# Altium PCB PCB_PCB_Simple Signal Generator_2021-09-18_2021-10-02.pcbdoc
Units mil, origin at the board's own origin, x right, y up, seen from the top; angles counter-clockwise.
Board outline 4947.01 x 5831.86 mil, 2 copper layers (Top Layer, Bottom Layer); 25 components, 14 nets, 79 pads, 0 vias.
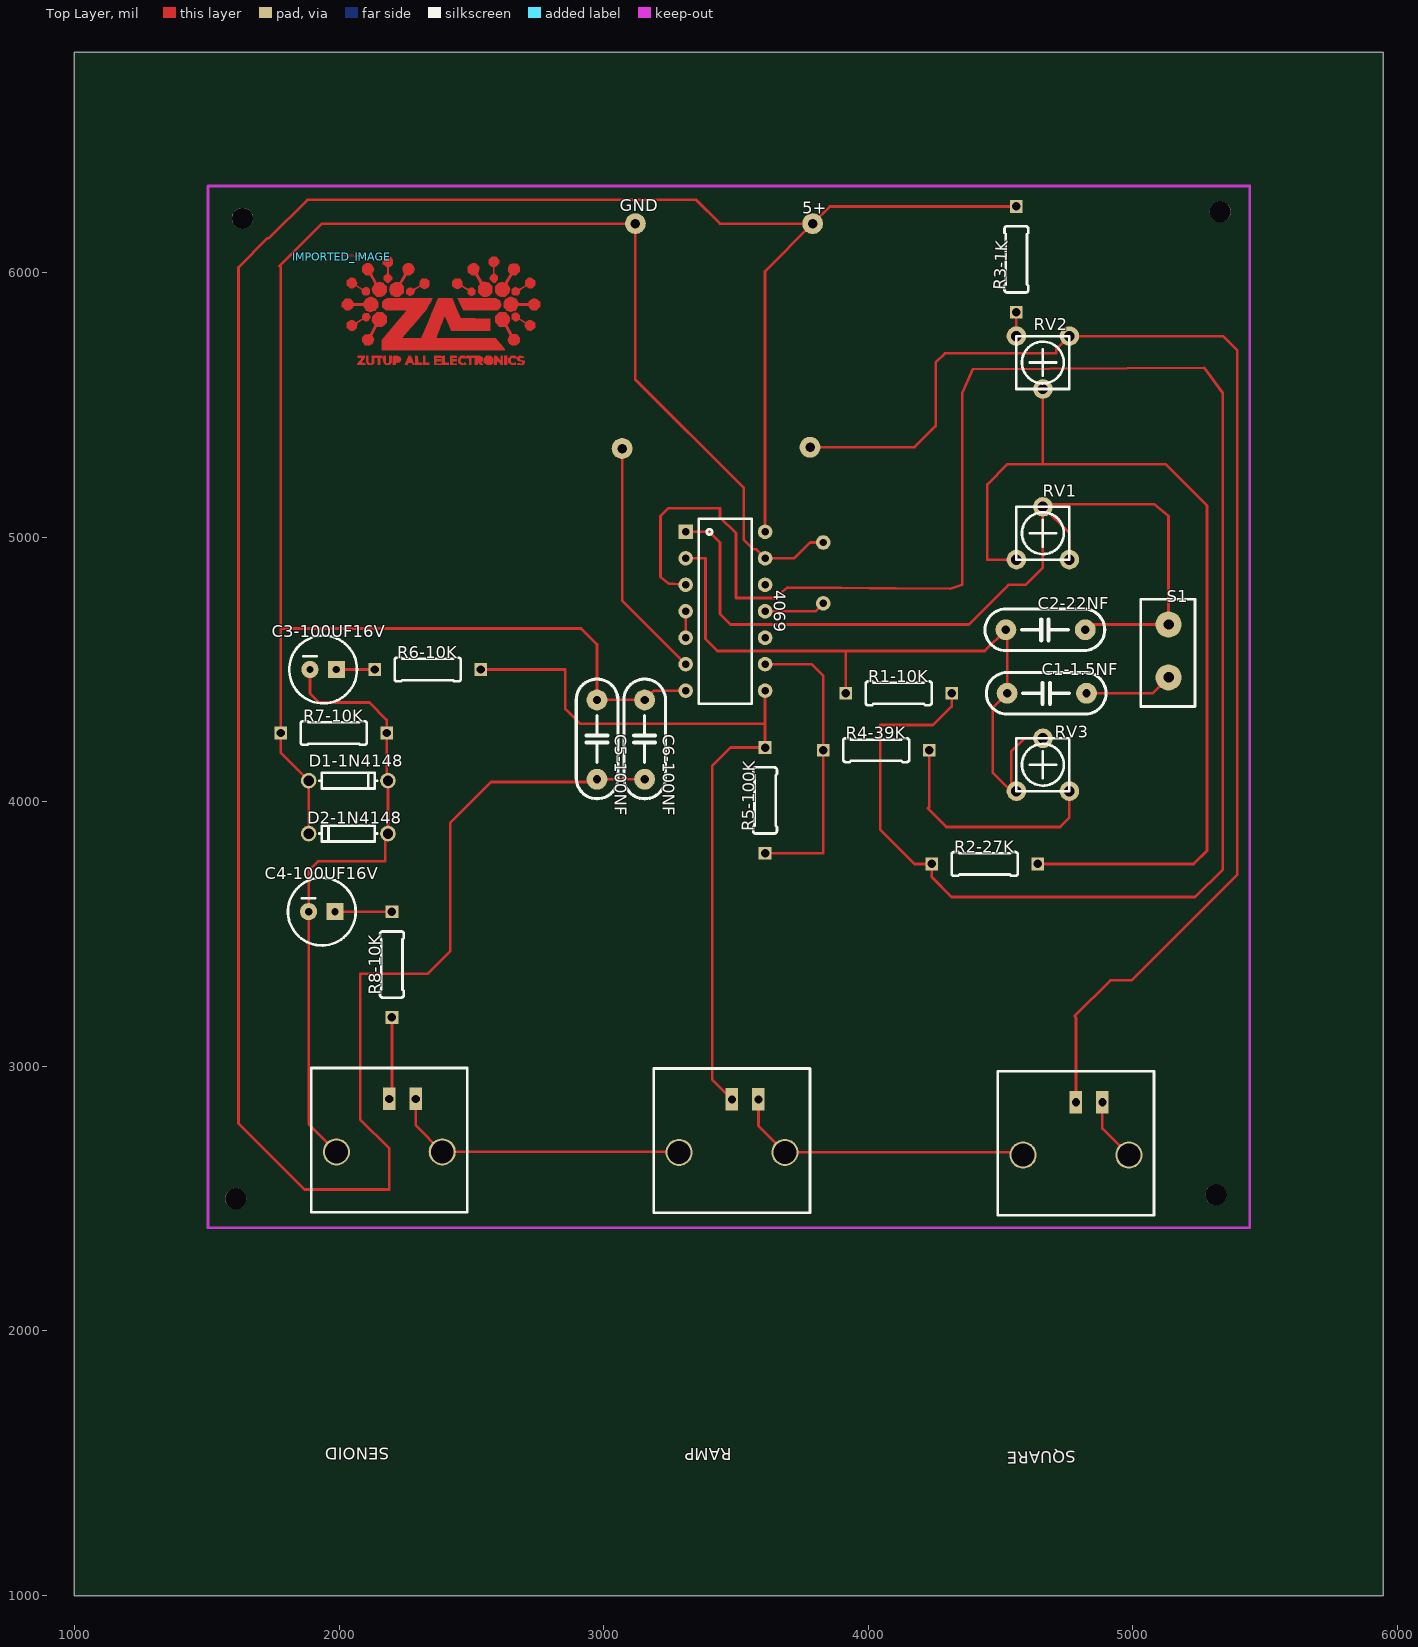
[diagram p0: Top Layer view]
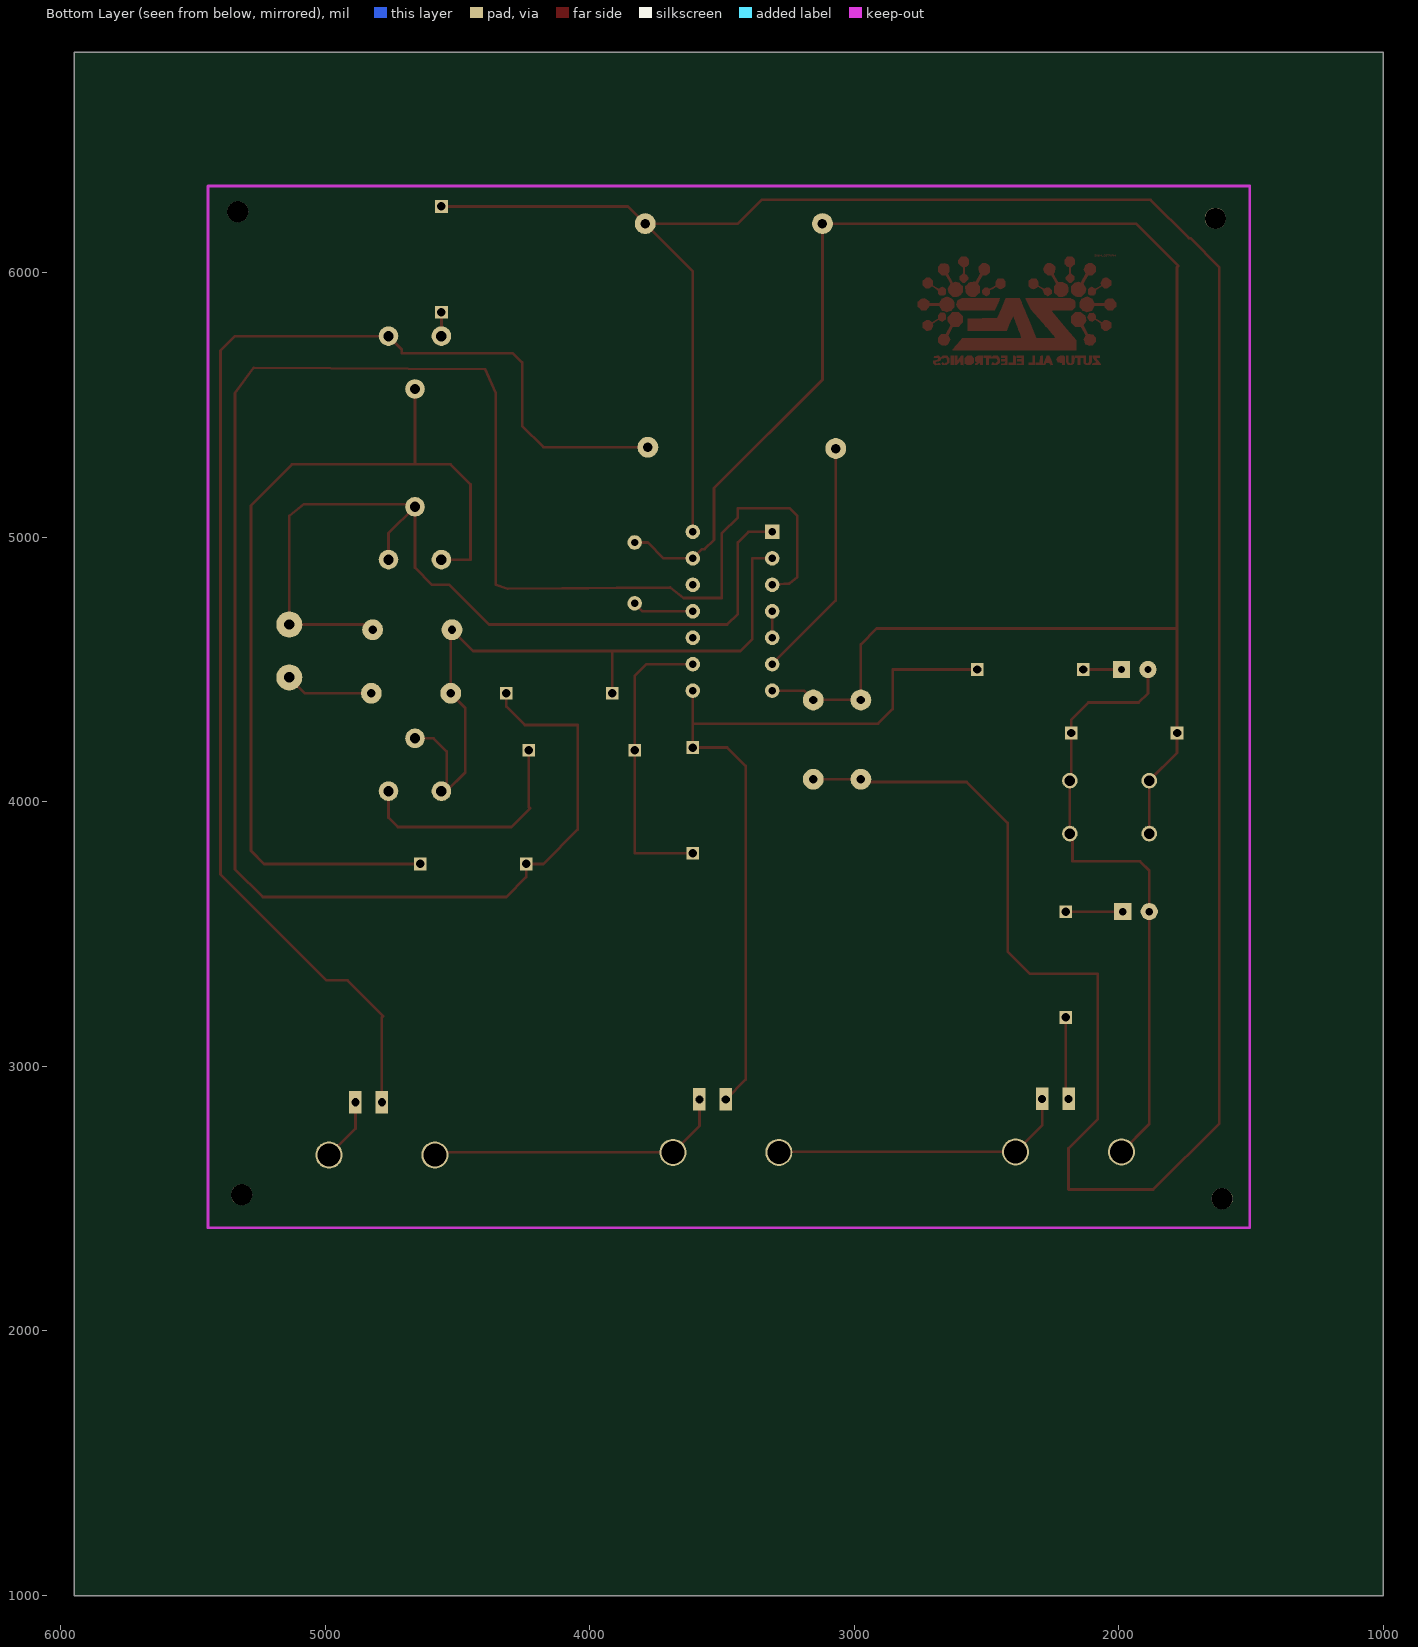
[diagram p1: Bottom Layer view, seen from below]

## Layer stack, top to bottom
Top Layer: signal copper (thickness not stored)
Dielectric: dielectric 12.6, FR-4, Dk 4.8
Bottom Layer: signal copper (thickness not stored)

## Board outline
5947.01,1000 1000,1000 1000,6831.86 5947.01,6831.86

## Components (designator, comment, footprint, x,y, rotation, side; value= is the part's Value field where it differs from the comment)
4069 "DIP14" DIP14 3460,4719.85 r270 top
C1-1.5NF "7X5MM-CAP" 7X5MM-CAP 4525,4409.85 r0 top
C2-22NF "7X5MM-CAP" 7X5MM-CAP 4520,4649.85 r0 top
C3-100UF16V "CPOL-RADIAL-100UF-25V" CPOL-RADIAL-100UF-25V 1940,4499.85 r0 top
C4-100UF16V "CPOL-RADIAL-100UF-25V" CPOL-RADIAL-100UF-25V 1935,3584.85 r0 top
C5-100NF "7X5MM-CAP" 7X5MM-CAP 2975,4384.85 r270 top
C6-100NF "7X5MM-CAP" 7X5MM-CAP 3155,4384.85 r270 top
D1-1N4148 "DO-1N4148" DO-1N4148 2035,4079.85 r0 top
D2-1N4148 "DO-1N4148" DO-1N4148 2035,3879.85 r180 top
IMPORTED_IMAGE "IMPORTED_IMAGE" IMPORTED_IMAGE 2010.51,6059.6 r0 top
R1-10K "RTH025W" RTH025W 4115,4409.85 r0 top
R2-27K "RTH025W" RTH025W 4440,3764.85 r0 top
R3-1K "RTH025W" RTH025W 4560,6049.85 r90 top
R4-39K "RTH025W" RTH025W 4030,4194.85 r0 top
R5-100K "RTH025W" RTH025W 3610,4004.85 r90 top
R6-10K "RTH025W" RTH025W 2335,4499.85 r0 top
R7-10K "RTH025W" RTH025W 1980,4259.85 r0 top
R8-10K "RTH025W" RTH025W 2200,3384.85 r90 top
RAMP "BNC" BNC 3485,2774.85 r180 top
RV1 "TRIM_POT_PTH" TRIM_POT_PTH 4660,5014.85 r0 top
RV2 "TRIM_POT_PTH" TRIM_POT_PTH 4660,5659.85 r180 top
RV3 "TRIM_POT_PTH" TRIM_POT_PTH 4660,4139.85 r0 top
S1 "CHAVE PUSH" "CHAVE PUSH" 5135,4569.85 r0 top
SENOID "BNC" BNC 2190,2776.85 r180 top
SQUARE "BNC" BNC 4785,2764.85 r180 top

## Footprints (in the part's own frame and the unit in brackets; to place one, negate y for a bottom-side part, rotate by r counter-clockwise, add the part's x,y. Pads: shape width x height; smd on the part's side, far side on the other; paste and mask are expansions set on the pad)
7X5MM-CAP [mm]
  round 2 hole 0.8: 1(0,0) 2(7.62,0)
  silkscreen extent -2,-2 9.49,2.01
BNC [mil]
  round 102.4 hole 86.6: 3(-200,100) 4(200,100)
  rect 47.2x85 hole 31.4: GND(-100,-100) S(0,-100)
  silkscreen extent -295,-217 295,328
"CHAVE PUSH" [mm]
  round 2.5 hole 1: 1(0,2.54) 2(0,-2.54)
  silkscreen extent -2.67,-5.33 2.54,4.95
CPOL-RADIAL-100UF-25V [mil]
  rect 65x65 hole 27.6: 1(50,0)
  round 65 hole 27.6: 2(-50,0)
  silkscreen extent -128,-128 128,128
DIP14 [mil]
  rect 55x55 hole 28: 1(-300,-150)
  round 55 hole 28: 2(-200,-150) 3(-100,-150) 4(0,-150) 5(100,-150) 6(200,-150) 7(300,-150) 8(300,150) 9(200,150) 10(100,150) 11(0,150) 12(-100,150) 13(-200,150) 14(-300,150)
  silkscreen extent -350,-100 350,100
DO-1N4148 [mm]
  round 1.5 hole 1: A(-3.81,0) C(3.81,0)
  silkscreen extent -2.79,-0.76 2.79,0.76
IMPORTED_IMAGE [mil]
  Top Layer region: 249.31,-405.23 246.94,-409.49 242.83,-408.55 238.72,-407.61 245.54,-391.02 252.36,-374.42 261.3,-374.42 267.18,-388.36 268.99,-392.65 270.7,-396.71 272.22,-400.32 273.44,-403.23 274.26,-405.21 275.81,-408.94 267.14,-408.94 264.09,-400.98 251.68,-400.98 hole: 22643809.49,56673086.88 22643809.49,56633256.88 22643809.49,56633256.88 22696739.49,56633256.88 22696739.49,56633256.88 22696739.49,56712916.88 22696739.49,56712916.88 22643809.49,56712916.88 22643809.49,56712916.88 22643809.49,56673086.88
  Top Layer region: 581.58,-408.45 576.95,-409.33 576.95,-374.42 584.38,-374.42 592.48,-384.38 600.59,-394.34 600.77,-374.42 608.71,-374.42 608.71,-408.94 601.24,-408.94 594.56,-400.98 587.89,-393.02 586.21,-407.57
  Top Layer region: 686.97,-406.13 683.18,-409.28 662.96,-407.61 665.61,-402.3 672.74,-402.96 679.87,-403.61 681.36,-401.18 682.86,-398.75 673.57,-395.67 669.97,-394.41 667.01,-393.24 665.02,-392.29 664.28,-391.69 664.25,-391.43 664.17,-391.04 664.03,-390.53 663.85,-389.92 663.63,-389.24 663.38,-388.5 663.11,-387.72 662.81,-386.93 661.33,-383.07 665.79,-378.6 670.24,-374.13 678.31,-374.94 686.37,-375.75 687.46,-379.07 688.54,-382.39 672.22,-382.39 672.22,-387.29 681.49,-390.35 690.75,-393.42 690.75,-402.98
  Top Layer region: 449.01,-408.94 444.17,-404.55 439.33,-400.15 439.33,-386.22 447.57,-374.42 464.74,-374.42 467.91,-377.61 471.09,-380.79 471.09,-374.42 500.2,-374.42 500.2,-382.39 489.61,-382.39 489.61,-408.94 481.67,-408.94 481.67,-382.92 450.1,-382.92 447.15,-392.26 448.74,-396.41 449.14,-397.28 449.68,-398.15 450.32,-399 451.06,-399.81 451.86,-400.55 452.71,-401.2 453.57,-401.74 454.42,-402.14 458.52,-403.72 461.81,-400.99 465.09,-398.26 471.22,-405.67 466.97,-407.31 466.5,-407.47 465.97,-407.63 465.4,-407.79 464.78,-407.94 464.11,-408.08 463.42,-408.22 462.7,-408.34 461.95,-408.46 461.19,-408.57 460.41,-408.66 459.64,-408.74 458.86,-408.81 458.09,-408.87 457.32,-408.91 456.58,-408.93 455.86,-408.94
  Top Layer region: 58.22,-408.94 58.22,-406.85 58.23,-406.73 58.26,-406.59 58.31,-406.43 58.38,-406.24 58.58,-405.81 58.84,-405.31 59.17,-404.74 59.57,-404.11 60.02,-403.42 60.52,-402.67 61.08,-401.88 61.68,-401.05 62.33,-400.19 63.01,-399.3 63.73,-398.39 64.48,-397.45 64.87,-396.98 65.26,-396.51 65.65,-396.04 66.06,-395.56 67.63,-393.68 69.11,-391.84 70.45,-390.09 71.62,-388.49 72.59,-387.07 73.34,-385.88 73.81,-384.97 73.99,-384.38 74.1,-382.39 60.87,-382.39 60.87,-374.42 87.34,-374.42 87.34,-378.2 87.33,-378.4 87.3,-378.63 87.26,-378.87 87.2,-379.12 87.13,-379.39 87.04,-379.68 86.93,-379.98 86.81,-380.29 86.68,-380.62 86.53,-380.95 86.37,-381.3 86.2,-381.66 86.02,-382.03 85.82,-382.41 85.61,-382.79 85.39,-383.19 85.16,-383.59 84.92,-383.99 84.67,-384.4 84.41,-384.82 84.14,-385.24 83.87,-385.66 83.58,-386.08 83.29,-386.51 82.99,-386.93 82.68,-387.36 82.37,-387.78 82.05,-388.21 81.72,-388.63 81.39,-389.05 81.06,-389.46 80.72,-389.87 79.97,-390.77 79.27,-391.61 78.61,-392.41 78.01,-393.16 77.45,-393.86 76.95,-394.51 76.49,-395.12 76.08,-395.69 75.72,-396.23 75.41,-396.72 75.15,-397.17 74.94,-397.6 74.78,-397.99 74.66,-398.34 74.6,-398.67 74.59,-398.98 74.62,-399.25 74.71,-399.5 74.85,-399.73 75.03,-399.94 75.27,-400.13 75.55,-400.3 75.89,-400.46 76.28,-400.6 76.71,-400.73 77.2,-400.85 77.73,-400.97 78.32,-401.07 78.96,-401.17 79.65,-401.27 80.39,-401.37 81.18,-401.46 88.25,-402.3 89.34,-405.62 90.42,-408.94
  Top Layer region: 304.35,-404.96 304.35,-408.94 277.89,-408.94 277.89,-374.03 282.52,-374.91 287.15,-375.8 288.76,-400.98 304.35,-400.98
  Top Layer region: 145.56,-395.66 145.56,-408.94 134.97,-408.94 134.97,-382.39 124.39,-382.39 124.39,-374.42 153.5,-374.42 153.5,-382.39 145.56,-382.39
  Top Layer region: 546.93,-408.94 542.09,-404.55 537.25,-400.15 537.25,-384.13 541.63,-379.28 546.01,-374.42 561.98,-374.42 571.66,-383.21 571.66,-403.44 566.54,-406.19 565.98,-406.47 565.36,-406.75 564.69,-407.01 563.98,-407.26 563.22,-407.5 562.44,-407.73 561.63,-407.94 560.79,-408.13 559.95,-408.31 559.09,-408.47 558.24,-408.61 557.39,-408.73 556.55,-408.82 555.73,-408.89 554.94,-408.93 554.17,-408.94 hole: 25664259.49,56549906.88 25742949.49,56615436.88 25742949.49,56615436.88 25727049.49,56752756.88 25727049.49,56752756.88 25588249.49,56768896.88 25588249.49,56768896.88 25571629.49,56725456.88 25571629.49,56725456.88 25568294.47,56715981.98 25568294.47,56715981.98 25565182.46,56705693.91 25565182.46,56705693.91 25562361.77,56694921.4 25562361.77,56694921.4 25559900.74,56683993.13 25559900.74,56683993.13 25557867.67,56673237.84 25557867.67,56673237.84 25556330.89,56662984.23 25556330.89,56662984.23 25555358.73,56653561 25555358.73,56653561 25555019.49,56645296.88 25555019.49,56645296.88 25555019.49,56608566.88 25555019.49,56608566.88 25664259.49,56549906.88
  Top Layer region: 349.35,-408.94 349.35,-374.42 375.81,-374.42 375.81,-382.39 357.28,-382.39 357.28,-387.7 373.16,-387.7 373.16,-395.66 357.28,-395.66 357.28,-403.63 375.81,-403.63 375.81,-408.94
  Top Layer region: 98.11,-408.94 95.37,-403.81 92.63,-398.67 92.63,-374.42 100.57,-374.42 100.57,-397.67 104.42,-400.88 108.28,-404.09 111.04,-402.38 113.8,-400.66 113.8,-374.42 121.74,-374.42 121.74,-402.57 118.57,-405.76 115.39,-408.94
  Top Layer region: 614,-408.94 614,-374.42 624.59,-374.42 624.59,-408.94
  Top Layer region: 193.2,-408.94 193.2,-377.96 194.96,-376.19 195.49,-375.73 196.09,-375.32 196.76,-374.96 197.49,-374.66 198.27,-374.4 199.11,-374.2 199.99,-374.05 200.91,-373.94 201.88,-373.89 202.87,-373.87 203.89,-373.9 204.93,-373.98 205.98,-374.1 207.05,-374.25 208.12,-374.45 209.2,-374.68 210.27,-374.96 211.33,-375.27 212.38,-375.61 213.41,-375.99 214.42,-376.4 215.39,-376.84 216.34,-377.31 217.24,-377.81 218.1,-378.33 218.91,-378.89 219.67,-379.47 220.37,-380.07 221.01,-380.7 221.57,-381.34 222.06,-382.01 222.48,-382.7 225.14,-387.7 222.43,-392.79 219.71,-397.89 211.75,-399.64 203.78,-401.4 203.78,-408.94 hole: 22140959.49,56710976.88 22140959.49,56655916.88 22140959.49,56655916.88 22232979.49,56673696.88 22232979.49,56673696.88 22241839.49,56719866.88 22241839.49,56719866.88 22250709.49,56766026.88 22250709.49,56766026.88 22140959.49,56766026.88 22140959.49,56766026.88 22140959.49,56710976.88
  Top Layer region: 410.22,-408.94 410.22,-374.42 434.03,-374.42 434.03,-382.39 418.16,-382.39 418.16,-387.7 434.03,-387.7 434.03,-395.66 417.71,-395.66 418.8,-398.98 419.89,-402.3 434.03,-403.98 434.03,-408.94
  Top Layer region: 657.67,-406.29 656.03,-408.94 639.56,-408.94 629.88,-400.15 629.88,-384.13 634.26,-379.28 638.64,-374.42 655.7,-374.42 658.64,-377.98 661.59,-381.55 659.98,-383.17 658.37,-384.78 650.47,-383.2 642.58,-381.62 640.24,-385.32 639.77,-386.16 639.33,-387.12 638.93,-388.17 638.58,-389.28 638.28,-390.4 638.06,-391.52 637.92,-392.59 637.86,-393.58 637.82,-398.13 643.28,-401.07 648.74,-404 652.31,-401.03 655.87,-398.06 659.3,-403.63
  Top Layer region: 307,-408.94 307,-374.42 314.94,-374.42 314.94,-400.98 330.82,-400.98 330.82,-408.94
  Top Layer region: 502.85,-408.94 502.85,-374.42 521.72,-374.42 531.96,-379.92 531.96,-395.35 529.08,-397.14 526.2,-398.92 529.08,-401.81 529.66,-402.43 530.2,-403.1 530.69,-403.78 531.11,-404.47 531.46,-405.14 531.73,-405.76 531.9,-406.33 531.96,-406.82 531.94,-407.14 531.88,-407.44 531.78,-407.7 531.64,-407.94 531.48,-408.16 531.28,-408.34 531.05,-408.5 530.79,-408.64 530.51,-408.75 530.2,-408.83 529.87,-408.89 529.53,-408.92 529.16,-408.93 528.78,-408.92 528.38,-408.88 527.97,-408.82 527.55,-408.73 527.12,-408.62 526.69,-408.5 526.25,-408.35 525.81,-408.17 525.37,-407.98 524.93,-407.77 524.49,-407.53 524.06,-407.28 523.64,-407 523.23,-406.71 522.83,-406.39 522.44,-406.06 522.06,-405.71 521.71,-405.34 521.37,-404.96 520.66,-404.16 519.91,-403.41 519.13,-402.74 518.36,-402.15 517.61,-401.66 516.92,-401.29 516.29,-401.06 515.75,-400.98 513.43,-400.98 513.43,-408.94 hole: 25237429.49,56655916.88 25330059.49,56673816.88 25330059.49,56673816.88 25330059.49,56752026.88 25330059.49,56752026.88 25237429.49,56769926.88 25237429.49,56769926.88 25237429.49,56655916.88
  Top Layer region: 378.46,-408.94 378.46,-377.96 380.22,-376.19 380.65,-375.84 381.18,-375.5 381.81,-375.2 382.5,-374.94 383.24,-374.72 384.01,-374.56 384.77,-374.46 385.51,-374.42 389.04,-374.42 389.04,-400.98 404.92,-400.98 404.92,-408.94
  Top Layer region: 185.17,-403.81 182.43,-408.94 164.73,-408.94 161.64,-405.2 161.31,-404.77 160.98,-404.25 160.65,-403.66 160.31,-403 159.98,-402.27 159.65,-401.49 159.32,-400.66 159,-399.78 158.69,-398.87 158.4,-397.93 158.11,-396.97 157.85,-395.99 157.61,-395 157.38,-394 157.19,-393.01 157.01,-392.03 155.49,-382.62 157.06,-378.52 158.63,-374.42 166.73,-374.42 166.73,-400.66 172.26,-404.09 176.11,-400.88 179.97,-397.67 179.97,-374.42 187.91,-374.42 187.91,-398.67
  Top Layer region: 170 vertices and 0 holes, not listed, extent 150.85,-353.18 616.65,-156.67
  Top Layer region: 100.12,-336.42 87.22,-333.95 81.98,-327.27 76.75,-320.6 76.75,-305.97 81.55,-300.03 86.34,-294.08 106.66,-290.77 115.25,-275.2 123.85,-259.62 118.54,-250.59 113.23,-241.56 116.63,-223.38 124.68,-216.58 132.73,-209.78 153.91,-209.78 161.64,-217.55 169.38,-225.31 169.38,-248.62 161.33,-256.36 153.28,-264.1 132.64,-264.1 123.68,-280.27 114.72,-296.45 122.53,-312.99 119.04,-321.45 115.54,-329.92
  Top Layer region: 644.21,-335.37 638.73,-332.42 633.25,-329.48 629.76,-321.02 626.26,-312.56 630.64,-304.9 635.03,-297.24 616.93,-264.47 594.77,-263.91 587.18,-255.39 579.6,-246.88 579.6,-225.31 587.33,-217.55 595.07,-209.78 618.74,-209.78 626.96,-219.17 635.17,-228.56 635.15,-242.98 630.19,-251.14 625.23,-259.3 634.41,-275.7 643.6,-292.1 661.25,-292.1 666.74,-299.1 672.22,-306.1 672.22,-323.04 665.92,-328.98 659.62,-334.93 651.91,-335.15
  Top Layer region: 50.26,-274.07 44.41,-278.82 32.47,-278.82 25.5,-273.32 18.53,-267.82 18.53,-250 25.5,-244.5 32.47,-238.99 43.81,-238.99 49.23,-242.8 54.65,-246.61 65.7,-239.99 76.75,-233.38 76.75,-222.15 81.25,-217.16 85.74,-212.18 93.8,-212.97 101.86,-213.76 105.39,-221.21 108.93,-228.65 104.82,-234.95 100.71,-241.24 95.45,-242.92 90.18,-244.6 84.69,-241.65 79.2,-238.7 57.46,-250.94 56.11,-269.32
  Top Layer region: 723.48,-273.32 716.5,-278.82 711.78,-278.82 711.28,-278.82 710.75,-278.79 710.19,-278.75 709.61,-278.69 709.02,-278.62 708.41,-278.54 707.8,-278.45 707.19,-278.34 706.58,-278.22 705.98,-278.1 705.39,-277.96 704.81,-277.82 704.26,-277.66 703.74,-277.51 703.24,-277.34 702.78,-277.18 698.49,-275.52 694.43,-267.64 690.37,-259.76 691.81,-256 693.24,-252.24 671.67,-238.58 656.38,-244.93 643.11,-236.22 643.11,-218.81 646.29,-215.62 649.46,-212.44 663.91,-212.44 668.07,-216.61 672.22,-220.78 672.22,-233.38 683.28,-239.99 694.33,-246.61 699.74,-242.8 705.16,-238.99 716.5,-238.99 730.45,-250 730.45,-267.82
  Top Layer region: 117.77,-206.73 109.83,-208.91 92.31,-204.24 86.92,-195.06 81.52,-185.88 42.34,-185.88 42.34,-188.43 42.31,-188.72 42.23,-189.06 42.08,-189.44 41.89,-189.85 41.64,-190.31 41.35,-190.79 41.02,-191.3 40.64,-191.83 40.23,-192.38 39.78,-192.94 39.31,-193.52 38.8,-194.1 38.27,-194.68 37.72,-195.26 37.14,-195.84 36.55,-196.4 30.76,-201.82 12.99,-201.82 6.5,-195.3 0,-188.78 0,-172.9 12.55,-158.27 31.5,-158.27 36.92,-163.19 38.01,-164.25 39.03,-165.39 39.95,-166.55 40.75,-167.72 41.41,-168.85 41.92,-169.91 42.23,-170.87 42.34,-171.69 42.34,-175.26 81.91,-175.26 86.12,-167.1 90.33,-158.93 99.25,-155.03 100.63,-154.43 101.89,-153.89 102.67,-153.57 103.41,-153.27 104.11,-153 104.77,-152.75 105.4,-152.53 106,-152.34 106.57,-152.18 107.12,-152.04 107.66,-151.93 108.18,-151.84 108.7,-151.79 109.2,-151.75 109.71,-151.75 110.22,-151.77 110.73,-151.82 111.25,-151.9 111.79,-152 112.34,-152.13 112.92,-152.28 113.52,-152.46 114.14,-152.67 114.8,-152.9 115.5,-153.16 116.24,-153.45 117.02,-153.76 118.28,-154.28 120.16,-155.06 128.99,-158.77 137.62,-171.13 137.61,-180.5 137.59,-189.87 131.65,-197.21 125.71,-204.55
  Top Layer region: 647.9,-206.57 639.14,-208.91 631.2,-206.73 623.26,-204.55 617.32,-197.21 611.38,-189.87 611.35,-171.13 615.66,-164.96 619.97,-158.79 628.72,-154.97 630.08,-154.38 631.32,-153.85 632.09,-153.52 632.81,-153.23 633.5,-152.96 634.15,-152.72 634.77,-152.51 635.36,-152.32 635.93,-152.16 636.48,-152.02 637.01,-151.92 637.53,-151.83 638.04,-151.78 638.54,-151.75 639.05,-151.75 639.55,-151.77 640.06,-151.82 640.59,-151.9 641.12,-152 641.67,-152.13 642.25,-152.29 642.85,-152.47 643.48,-152.68 644.14,-152.92 644.84,-153.18 645.58,-153.46 646.36,-153.78 647.63,-154.3 649.51,-155.08 658.38,-158.8 663.23,-167.03 668.07,-175.26 706.63,-175.26 706.63,-167.22 723.83,-156.56 730.45,-158.14 731.15,-158.33 731.9,-158.57 732.68,-158.86 733.49,-159.19 734.32,-159.57 735.16,-159.98 736.02,-160.42 736.87,-160.9 737.72,-161.39 738.56,-161.92 739.39,-162.45 740.19,-163.01 740.96,-163.57 741.69,-164.15 742.38,-164.72 743.02,-165.3 748.97,-170.88 748.97,-188.78 742.48,-195.3 735.98,-201.82 717.69,-201.82 711.01,-193.85 704.33,-185.88 667.45,-185.88 656.66,-204.24
  Top Layer region: 458.52,-201.82 450.63,-185.22 449.82,-183.5 449.01,-181.76 448.2,-180.03 447.42,-178.3 446.65,-176.6 445.9,-174.93 445.18,-173.31 444.5,-171.74 443.86,-170.24 443.26,-168.83 442.71,-167.5 442.21,-166.28 441.77,-165.17 441.39,-164.19 441.09,-163.34 440.85,-162.65 438.97,-156.67 582.51,-156.67 590.03,-160.57 597.55,-164.48 603.19,-180.72 601.59,-185.29 601.39,-185.79 601.15,-186.33 600.87,-186.92 600.54,-187.54 600.17,-188.19 599.77,-188.87 599.34,-189.57 598.88,-190.28 598.39,-191 597.89,-191.72 597.36,-192.45 596.83,-193.16 596.28,-193.86 595.73,-194.55 595.17,-195.21 594.62,-195.84 589.26,-201.82
  Top Layer region: 532.04,-151.36 523.62,-143.81 515.2,-136.26 515.2,-111.6 519.38,-106.92 523.55,-102.24 513.86,-85.69 504.17,-69.15 490.33,-69.04 483.35,-63.54 476.38,-58.03 476.38,-38.19 479.69,-34.03 480.05,-33.59 480.46,-33.14 480.91,-32.67 481.39,-32.19 481.9,-31.7 482.44,-31.21 483,-30.72 483.58,-30.24 484.17,-29.76 484.77,-29.3 485.37,-28.85 485.97,-28.42 486.57,-28.02 487.16,-27.63 487.73,-27.28 488.29,-26.97 488.86,-26.67 489.48,-26.38 490.13,-26.1 490.82,-25.83 491.54,-25.57 492.28,-25.33 493.04,-25.1 493.81,-24.89 494.59,-24.7 495.36,-24.52 496.13,-24.37 496.88,-24.24 497.62,-24.14 498.33,-24.06 499.01,-24 499.66,-23.98 505.73,-23.9 518.72,-36.94 518.72,-45.2 518.71,-46.07 518.67,-46.97 518.6,-47.89 518.5,-48.82 518.38,-49.77 518.24,-50.72 518.07,-51.66 517.89,-52.59 517.69,-53.51 517.47,-54.39 517.24,-55.25 516.99,-56.06 516.73,-56.83 516.46,-57.54 516.18,-58.19 515.89,-58.78 513.05,-64.09 530.87,-94.27 537.37,-95.01 538.06,-95.1 538.8,-95.19 539.57,-95.29 540.38,-95.41 541.21,-95.53 542.05,-95.66 542.91,-95.8 543.77,-95.94 544.63,-96.08 545.48,-96.23 546.32,-96.38 547.13,-96.53 547.92,-96.68 548.67,-96.82 549.38,-96.97 550.05,-97.11 556.23,-98.47 562.62,-105.39 569.01,-112.31 568.89,-134.1 564.32,-139.76 563.74,-140.47 563.14,-141.15 562.53,-141.81 561.91,-142.45 561.28,-143.07 560.64,-143.66 559.98,-144.24 559.31,-144.79 558.63,-145.32 557.94,-145.83 557.24,-146.32 556.53,-146.78 555.8,-147.22 555.07,-147.65 554.32,-148.04 553.57,-148.42 552.8,-148.77 552.02,-149.11 551.23,-149.41 550.43,-149.7 549.63,-149.97 548.81,-150.21 547.98,-150.43 547.14,-150.62 546.3,-150.79 545.44,-150.94 544.57,-151.07 543.7,-151.18 542.82,-151.26 541.92,-151.32 541.02,-151.35 540.11,-151.36
  Top Layer region: 209.16,-151.36 208.33,-151.35 207.46,-151.3 206.54,-151.22 205.59,-151.11 204.62,-150.98 203.63,-150.82 202.63,-150.64 201.63,-150.43 200.64,-150.2 199.65,-149.96 198.69,-149.7 197.76,-149.42 196.86,-149.13 196,-148.83 195.19,-148.51 194.45,-148.19 187.51,-145.02 183.74,-137.7 183.32,-136.86 182.93,-136.02 182.56,-135.18 182.22,-134.33 181.9,-133.48 181.61,-132.63 181.35,-131.78 181.11,-130.93 180.9,-130.07 180.71,-129.21 180.55,-128.35 180.41,-127.49 180.31,-126.63 180.22,-125.76 180.16,-124.9 180.13,-124.03 180.13,-123.17 180.14,-122.3 180.19,-121.43 180.26,-120.56 180.36,-119.69 180.48,-118.82 180.63,-117.95 180.8,-117.08 181,-116.21 181.23,-115.34 181.48,-114.47 181.76,-113.6 182.06,-112.73 182.39,-111.86 182.75,-111 183.13,-110.13 186.29,-103.16 193.58,-99.38 200.88,-95.6 218.34,-95.49 227.13,-80.41 235.91,-65.33 233.08,-59.1 232.79,-58.42 232.51,-57.69 232.24,-56.92 231.98,-56.1 231.73,-55.24 231.5,-54.36 231.28,-53.46 231.08,-52.54 230.9,-51.61 230.74,-50.69 230.59,-49.77 230.47,-48.87 230.38,-47.98 230.31,-47.13 230.26,-46.31 230.25,-45.53 230.25,-38.19 233.56,-34.03 233.92,-33.59 234.33,-33.14 234.78,-32.67 235.26,-32.19 235.77,-31.7 236.31,-31.21 236.87,-30.72 237.45,-30.24 238.04,-29.76 238.64,-29.3 239.24,-28.85 239.84,-28.42 240.44,-28.02 241.03,-27.63 241.6,-27.28 242.16,-26.97 242.79,-26.63 243.42,-26.32 244.05,-26.02 244.69,-25.75 245.32,-25.5 245.95,-25.27 246.58,-25.06 247.21,-24.87 247.84,-24.7 248.48,-24.55 249.11,-24.43 249.74,-24.32 250.37,-24.24 251,-24.18 251.63,-24.13 252.25,-24.11 252.88,-24.11 253.51,-24.13 254.13,-24.18 254.76,-24.24 255.38,-24.32 256.01,-24.43 256.63,-24.55 257.25,-24.7 257.87,-24.87 258.48,-25.06 259.1,-25.27 259.71,-25.5 260.33,-25.75 260.94,-26.02 261.55,-26.32 262.16,-26.63 267.25,-29.37 275.35,-45.1 273.68,-51.8 272,-58.51 258.65,-69.04 244.81,-69.15 235.11,-85.69 225.42,-102.24 229.82,-107.16 234.22,-112.09 234.22,-135.86 216.93,-151.36
  Top Layer region: 624.66,-143.74 617.05,-151.36 600.42,-151.36 594.64,-148.4 594.03,-148.06 593.38,-147.68 592.72,-147.26 592.03,-146.8 591.34,-146.3 590.63,-145.77 589.92,-145.21 589.21,-144.64 588.51,-144.04 587.83,-143.43 587.16,-142.82 586.52,-142.2 585.9,-141.58 585.32,-140.96 584.78,-140.36 584.29,-139.76 579.71,-134.1 579.65,-123.2 579.6,-112.31 585.99,-105.39 592.38,-98.47 606.15,-95 616.66,-97.76 635.85,-63.34 632.86,-60.35 629.88,-57.36 629.88,-39.48 632.7,-34.2 635.52,-28.91 641.3,-26.47 647.08,-24.03 662.96,-26.57 672.22,-37.77 672.22,-56.01 665.73,-62.52 659.23,-69.04 644.27,-69.04 634.77,-85.2 625.27,-101.36 636.02,-121.05 634.14,-128.58 632.26,-136.11
  Top Layer region: 131.92,-151.36 124.32,-143.74 116.72,-136.11 114.84,-128.58 112.95,-121.05 118.33,-111.2 123.7,-101.36 114.2,-85.2 104.71,-69.04 89.74,-69.04 83.24,-62.52 76.75,-56.01 76.75,-38.19 80.06,-34.03 80.42,-33.59 80.83,-33.14 81.28,-32.67 81.76,-32.19 82.27,-31.7 82.81,-31.21 83.37,-30.72 83.95,-30.24 84.54,-29.76 85.14,-29.3 85.74,-28.85 86.34,-28.42 86.94,-28.02 87.53,-27.63 88.1,-27.28 88.66,-26.97 89.23,-26.67 89.83,-26.38 90.47,-26.1 91.14,-25.83 91.83,-25.57 92.53,-25.33 93.25,-25.1 93.97,-24.89 94.7,-24.7 95.42,-24.52 96.12,-24.37 96.82,-24.24 97.49,-24.14 98.13,-24.06 98.74,-24 99.32,-23.98 104.68,-23.9 115.72,-31.65 118.99,-39.59 122.27,-47.52 118.08,-55.94 113.89,-64.36 123.19,-81.04 132.48,-97.72 137.66,-96.36 142.83,-95 156.6,-98.47 162.99,-105.39 169.38,-112.31 169.32,-123.2 169.26,-134.1 164.69,-139.76 164.19,-140.36 163.65,-140.96 163.07,-141.58 162.46,-142.2 161.81,-142.82 161.15,-143.43 160.46,-144.04 159.76,-144.64 159.05,-145.21 158.35,-145.77 157.64,-146.3 156.94,-146.8 156.26,-147.26 155.59,-147.68 154.95,-148.06 154.34,-148.4 148.56,-151.36
  Top Layer region: 264.3,-145.8 257.33,-149.72 243.48,-140.62 243.48,-126.55 247.86,-121.7 252.24,-116.84 257.3,-116.84 257.84,-116.85 258.41,-116.89 259,-116.95 259.62,-117.03 260.25,-117.13 260.89,-117.25 261.54,-117.39 262.19,-117.55 262.83,-117.72 263.47,-117.9 264.09,-118.1 264.69,-118.31 265.28,-118.53 265.83,-118.76 266.35,-119 266.83,-119.24 271.3,-121.65 282.54,-114.99 293.77,-108.34 293.77,-94.12 302.01,-82.32 321.14,-82.32 330.82,-91.11 330.82,-110.71 326.19,-114.7 325.69,-115.11 325.16,-115.54 324.59,-115.96 324,-116.39 323.39,-116.81 322.77,-117.22 322.13,-117.63 321.49,-118.03 320.84,-118.41 320.2,-118.77 319.56,-119.12 318.94,-119.44 318.34,-119.73 317.76,-120 317.2,-120.23 316.68,-120.43 311.81,-122.17 303.1,-118.03 294.4,-113.88 276.92,-124.55 274.09,-133.22 271.27,-141.89
  Top Layer region: 490.22,-149.72 483.3,-145.17 476.38,-140.62 476.38,-126.13 464.97,-120.05 453.56,-113.98 445.78,-118.03 438,-122.08 432.71,-120.48 432.15,-120.29 431.55,-120.07 430.93,-119.82 430.29,-119.53 429.63,-119.22 428.96,-118.88 428.29,-118.52 427.61,-118.14 426.94,-117.75 426.28,-117.34 425.63,-116.92 425,-116.5 424.4,-116.07 423.83,-115.64 423.29,-115.21 422.79,-114.79 418.16,-110.71 418.16,-92.03 426.91,-82.32 446.97,-82.32 455.21,-94.12 455.21,-108.34 466.44,-114.99 477.67,-121.65 482.14,-119.24 482.62,-119 483.14,-118.76 483.7,-118.53 484.28,-118.31 484.88,-118.1 485.51,-117.9 486.14,-117.72 486.79,-117.55 487.44,-117.39 488.09,-117.25 488.73,-117.13 489.36,-117.03 489.97,-116.95 490.57,-116.89 491.14,-116.85 491.67,-116.84 496.73,-116.84 501.31,-121.92 505.89,-126.99 505.03,-134.45 504.17,-141.9
  Top Layer region: 102.69,-142.86 99.51,-146.05 82.69,-146.05 79.58,-142.29 79.26,-141.87 78.94,-141.39 78.63,-140.86 78.33,-140.28 78.03,-139.66 77.75,-139.01 77.48,-138.32 77.23,-137.61 76.99,-136.87 76.77,-136.12 76.57,-135.37 76.39,-134.6 76.24,-133.84 76.11,-133.09 76.01,-132.35 75.94,-131.63 75.41,-124.73 64.92,-118.38 54.43,-112.03 49.12,-115.76 43.81,-119.5 32.47,-119.5 25.5,-113.99 18.53,-108.49 18.53,-90.67 32.47,-79.66 37.19,-79.66 37.69,-79.67 38.23,-79.7 38.78,-79.74 39.36,-79.8 39.96,-79.86 40.56,-79.95 41.17,-80.04 41.78,-80.15 42.39,-80.27 43,-80.39 43.59,-80.53 44.16,-80.67 44.71,-80.82 45.24,-80.98 45.73,-81.15 46.2,-81.31 50.48,-82.96 58.5,-98.52 55.62,-107.61 66.85,-114.37 78.07,-121.12 92.02,-113.17 98.94,-117.72 105.86,-122.27 105.86,-139.68
  Top Layer region: 669.21,-142.52 666.28,-146.05 649.46,-146.05 646.29,-142.86 643.11,-139.68 643.11,-122.27 650.03,-117.72 656.95,-113.17 663.93,-117.15 670.9,-121.12 682.2,-114.33 693.5,-107.55 693.14,-103.56 693.11,-103.13 693.08,-102.67 693.05,-102.17 693.03,-101.65 693.01,-101.11 693,-100.54 692.99,-99.97 692.98,-99.39 692.98,-98.8 692.98,-98.21 692.99,-97.63 693,-97.05 693.02,-96.49 693.04,-95.95 693.06,-95.43 693.09,-94.93 693.4,-90.29 698.69,-84.98 703.98,-79.66 716.5,-79.66 723.48,-85.17 730.45,-90.67 730.45,-107.2 724.69,-113.35 718.94,-119.5 706.44,-119.5 700.58,-115.78 694.72,-112.07 673.55,-126.14 672.84,-132.56 672.75,-133.23 672.64,-133.92 672.5,-134.62 672.33,-135.33 672.15,-136.04 671.94,-136.75 671.72,-137.45 671.48,-138.14 671.22,-138.8 670.96,-139.45 670.68,-140.06 670.4,-140.64 670.1,-141.18 669.81,-141.68 669.51,-142.12
  Top Layer region: 571.41,-98.25 558.42,-85.22 558.42,-76.77 565.04,-70.13 571.66,-63.49 571.66,-37.18 568.56,-37.18 568.22,-37.15 567.83,-37.09 567.42,-36.98 566.97,-36.83 566.5,-36.64 566,-36.42 565.48,-36.17 564.94,-35.89 564.4,-35.57 563.85,-35.23 563.29,-34.87 562.74,-34.49 562.19,-34.09 561.65,-33.66 561.13,-33.23 560.62,-32.78 555.78,-28.39 555.78,-10.62 561.07,-5.31 566.36,0 584.5,0 595.47,-13.99 595.47,-24.6 586.21,-33.37 576.95,-42.13 576.95,-62.77 583.57,-68.55 590.18,-74.32 590.18,-87.63 579.6,-98.25
  Top Layer region: 169.38,-98.25 158.79,-87.63 158.79,-74.32 165.41,-68.55 172.03,-62.77 172.03,-41.55 163.64,-34.53 155.26,-27.51 155.26,-10.69 160.09,-5.35 164.91,0 184.96,0 193.2,-11.8 193.2,-27.47 188.82,-32.32 187.87,-33.3 186.84,-34.21 185.76,-35.03 184.68,-35.75 183.62,-36.34 182.61,-36.79 181.68,-37.08 180.88,-37.18 177.32,-37.18 177.32,-63.49 190.55,-76.77 190.55,-85.22 177.56,-98.25
RTH025W [mil]
  rect 47.7x47.7 hole 32: 1(-200,0) 2(200,0)
  silkscreen extent -125,-45 125,45
TRIM_POT_PTH [mil]
  round 74 hole 39.4: 1(-100,-100) 2(0,100) 3(100,-100)
  silkscreen extent -100,-100 100,100

## Free pads (board coordinates)
  round 78.74 hole 36: 4(3120,6184.85) 5(3790,6184.85) 6(3070,5334.85) 7(3780,5339.85)
  round 55 hole 28: 14(3830,4749.85) 14(3830,4979.85)
  round 80 hole 80 unplated: ""(1610,2499.85) ""(1635,6204.85) ""(5315,2514.85) ""(5330,6229.85)

## Nets (pads, with @x,y where several pads share a name; then routed paths per layer and width w, separated by ;. In a path a pad name is that pad's centre, name@x,y a point inside that pad or via, vN(x,y) a via of type N, cw(c..) or ccw(c..) an arc to the next point about the centre after c; other vN are vias at no path point)
S$18: 
S$21: 
S$23: 
S$25: 
S$28: 
S$30: 
S$4756: RAMP.4 SENOID.3 SENOID.GND | length 1137.2
  Top Layer w10: SENOID.GND 2290,2776.85 SENOID.3 3283,2676.85 RAMP.4
S$4759: RAMP.3 RAMP.GND SQUARE.4 | length 1145.6
  Top Layer w10: RAMP.GND 3585,2774.85 RAMP.3 4575,2674.85 SQUARE.4
S$4763: SQUARE.3 SQUARE.GND | length 241.4
  Top Layer w10: SQUARE.GND 4885,2764.85 SQUARE.3
S$4876: 4069.1 4069.2 4069.3 4069.7 4069.8 4069.9 4069.13 4069.14 C1-1.5NF.1 C1-1.5NF.2 C2-22NF.1 C2-22NF.2 C3-100UF16V.1 C3-100UF16V.2 C4-100UF16V.1 C4-100UF16V.2 C5-100NF.1 C5-100NF.2 C6-100NF.1 C6-100NF.2 D1-1N4148.A D1-1N4148.C D2-1N4148.A D2-1N4148.C pad.4 pad.5 pad.14@3830,4979.85 R1-10K.1 R1-10K.2 R2-27K.1 R2-27K.2 R3-1K.1 R3-1K.2 R4-39K.1 R4-39K.2 R5-100K.1 R5-100K.2 R6-10K.1 R6-10K.2 R7-10K.1 R7-10K.2 R8-10K.1 R8-10K.2 RAMP.S RV1.1 RV1.2 RV1.3 RV2.2 RV2.3 RV3.1 RV3.2 RV3.3 S1.1 S1.2 SENOID.4 SENOID.S | length 43854.2
  Top Layer w10: 1780,4654.85 2915,4654.85 2975,4594.85 C5-100NF.1 C6-100NF.1 3190,4419.85 4069.7 ; D2-1N4148.C D1-1N4148.A 1780,4184.85 R7-10K.1 1780,6019.85 1775,6024.85 1935,6184.85 pad.4 3120,5594.85 3530,5184.85 3530,4989.85 3565,4954.85 3575,4954.85 4069.13 3720,4919.85 3780,4979.85 pad.14@3830,4979.85 ; C3-100UF16V.2 1890,4409.85 1925,4374.85 2115,4374.85 2180,4309.85 R7-10K.2 2180,4084.85 D1-1N4148.C D2-1N4148.A 2175,3869.85 2175,3774.85 1920,3774.85 1885,3739.85 C4-100UF16V.2 1885,2781.85 SENOID.4 ; C4-100UF16V.1 R8-10K.2 ; C3-100UF16V.1 R6-10K.1 ; SENOID.S 2200,2886.85 R8-10K.1 ; R6-10K.2 2855,4499.85 2855,4349.85 2910,4294.85 3610,4294.85 4069.8 R5-100K.2 3480,4204.85 3410,4134.85 3410,2949.85 RAMP.S ; C6-100NF.2 C5-100NF.2 2965,4074.85 2575,4074.85 2420,3919.85 2420,3434.85 2335,3349.85 2080,3349.85 2080,2799.85 2190,2689.85 2190,2534.85 1870,2534.85 1620,2784.85 1620,6019.85 1730,6129.85 1735,6129.85 1880,6274.85 3350,6274.85 3440,6184.85 pad.5 ; 4069.3 3245,4824.85 3215,4849.85 3215,5079.85 3245,5109.85 3440,5109.85 3440,5074.85 3500,5014.85 3500,4769.85 3645,4769.85 3695,4809.85 4310,4804.85 4355,4819.85 4355,5544.85 4395,5634.85 5270,5639.85 5340,5544.85 5340,3744.85 5235,3639.85 4315,3639.85 4240,3714.85 R2-27K.1 4175,3764.85 4045,3894.85 4045,4289.85 4245,4289.85 4315,4359.85 R1-10K.2 ; 4069.2 3385,4919.85 3385,4614.85 3430,4569.85 4440,4569.85 C2-22NF.1 4525,4644.85 C1-1.5NF.1 4470,4354.85 4470,4109.85 4540,4039.85 RV3.1 4540,4059.85 4540,4189.85 4590,4239.85 RV3.2 ; 4069.1 3400,5019.85 3440,4979.85 3440,4709.85 3480,4669.85 4380,4669.85 4530,4819.85 4595,4819.85 4660,4884.85 RV1.2 ; R5-100K.1 3830,3804.85 3830,4474.85 3785,4519.85 4069.9 ; 4069.14 3610,6004.85 pad.5 ; R1-10K.1 3915,4569.85 ; R4-39K.2 4230,3979.85 4225,3974.85 4295,3904.85 4725,3904.85 4760,3939.85 RV3.3 ; RV1.1 4450,4914.85 4450,5199.85 4525,5274.85 5125,5274.85 5280,5119.85 5280,3814.85 5230,3764.85 R2-27K.2 ; RV2.3 R3-1K.1 ; R3-1K.2 3855,6249.85 pad.5 ; 4660,5274.85 RV2.2 ; RV1.3 4760,5014.85 RV1.2 ; C2-22NF.2 4840,4669.85 S1.1 5135,5079.85 5080,5124.85 4670,5124.85 RV1.2 ; C1-1.5NF.2 5075,4409.85 S1.2
S$6435: 4069.4 4069.5 | length 100
  Top Layer w10: 4069.5 4069.4
S$6474: 4069.6 pad.6 | length 914.4
  Top Layer w10: pad.6 3070,4759.85 4069.6
S$6507: 4069.11 pad.14@3830,4749.85 | length 232.4
  Top Layer w10: 4069.11 3800,4719.85 pad.14@3830,4749.85
S$6622: pad.7 RV2.1 SQUARE.S | length 5104.8
  Top Layer w10: pad.7 4175,5339.85 4255,5419.85 4255,5659.85 4290,5694.85 4710,5694.85 4710,5709.85 RV2.1 5340,5759.85 5395,5704.85 5395,3724.85 4995,3324.85 4915,3324.85 4780,3189.85 4785,3184.85 SQUARE.S
pads on no net: 4069.10 4069.12

## Silkscreen, mask and mechanical layers (free items; w line width, h text height)
Top Overlay:
  text "GND" at 3060,6232.35 h45
  text "5+" at 3750,6222.35 h45